# Altium PCB CRYO_ASIC_connectors.PcbDoc
Units mm, origin at the board's own origin, x right, y up, seen from the top; angles counter-clockwise.
Board outline 49.2 x 49.2 mm, 4 copper layers (Top Layer, Layer 1, Layer 2, Bottom Layer), stack 1.539 mm thick; 8 components, 68 nets, 176 pads, 75 vias.
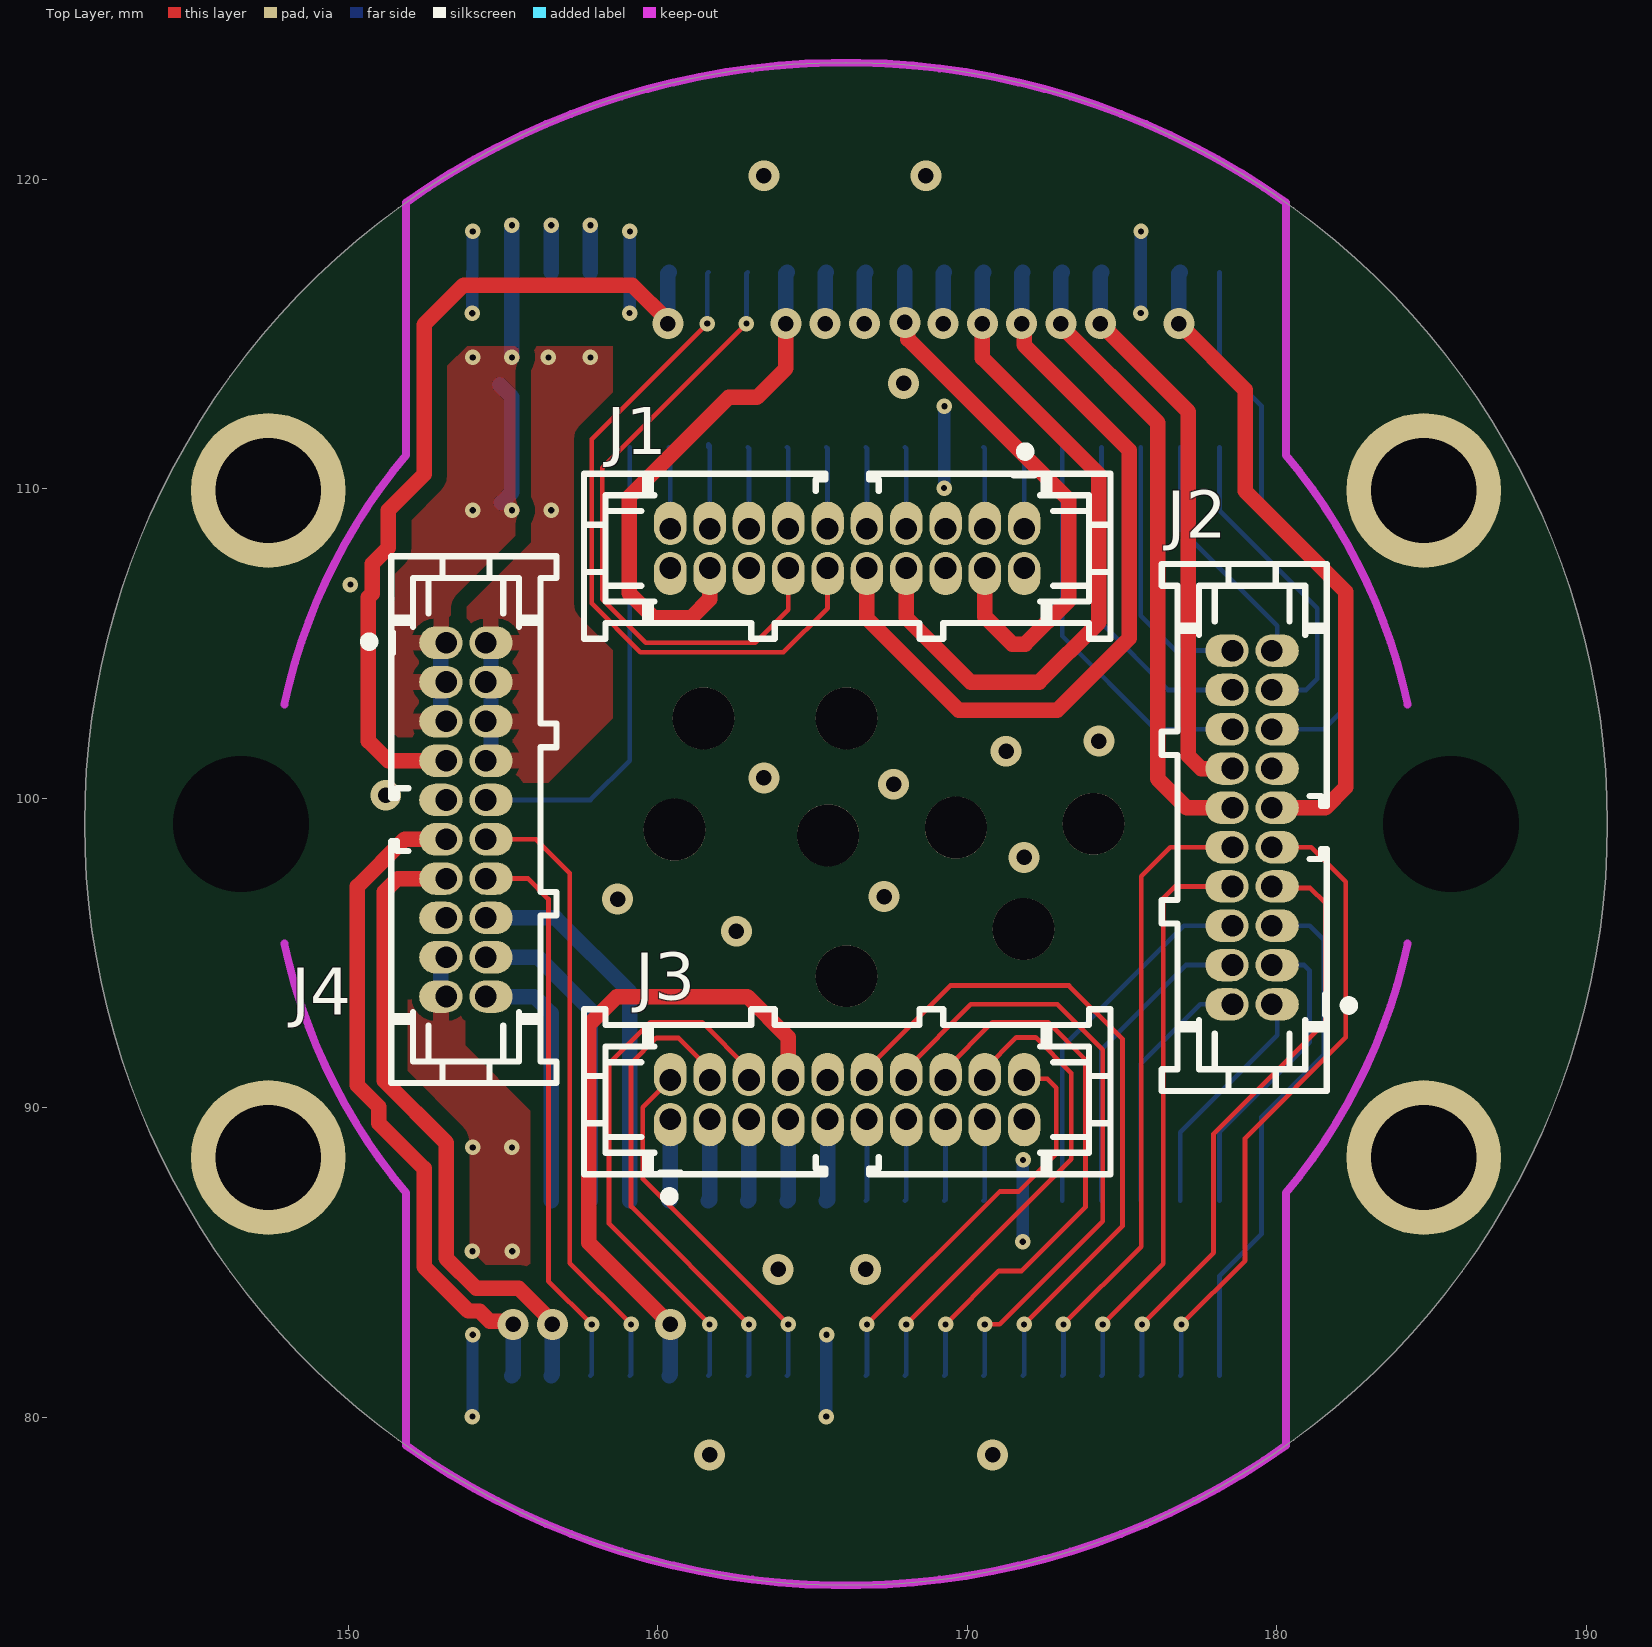
[diagram p0: Top Layer view]
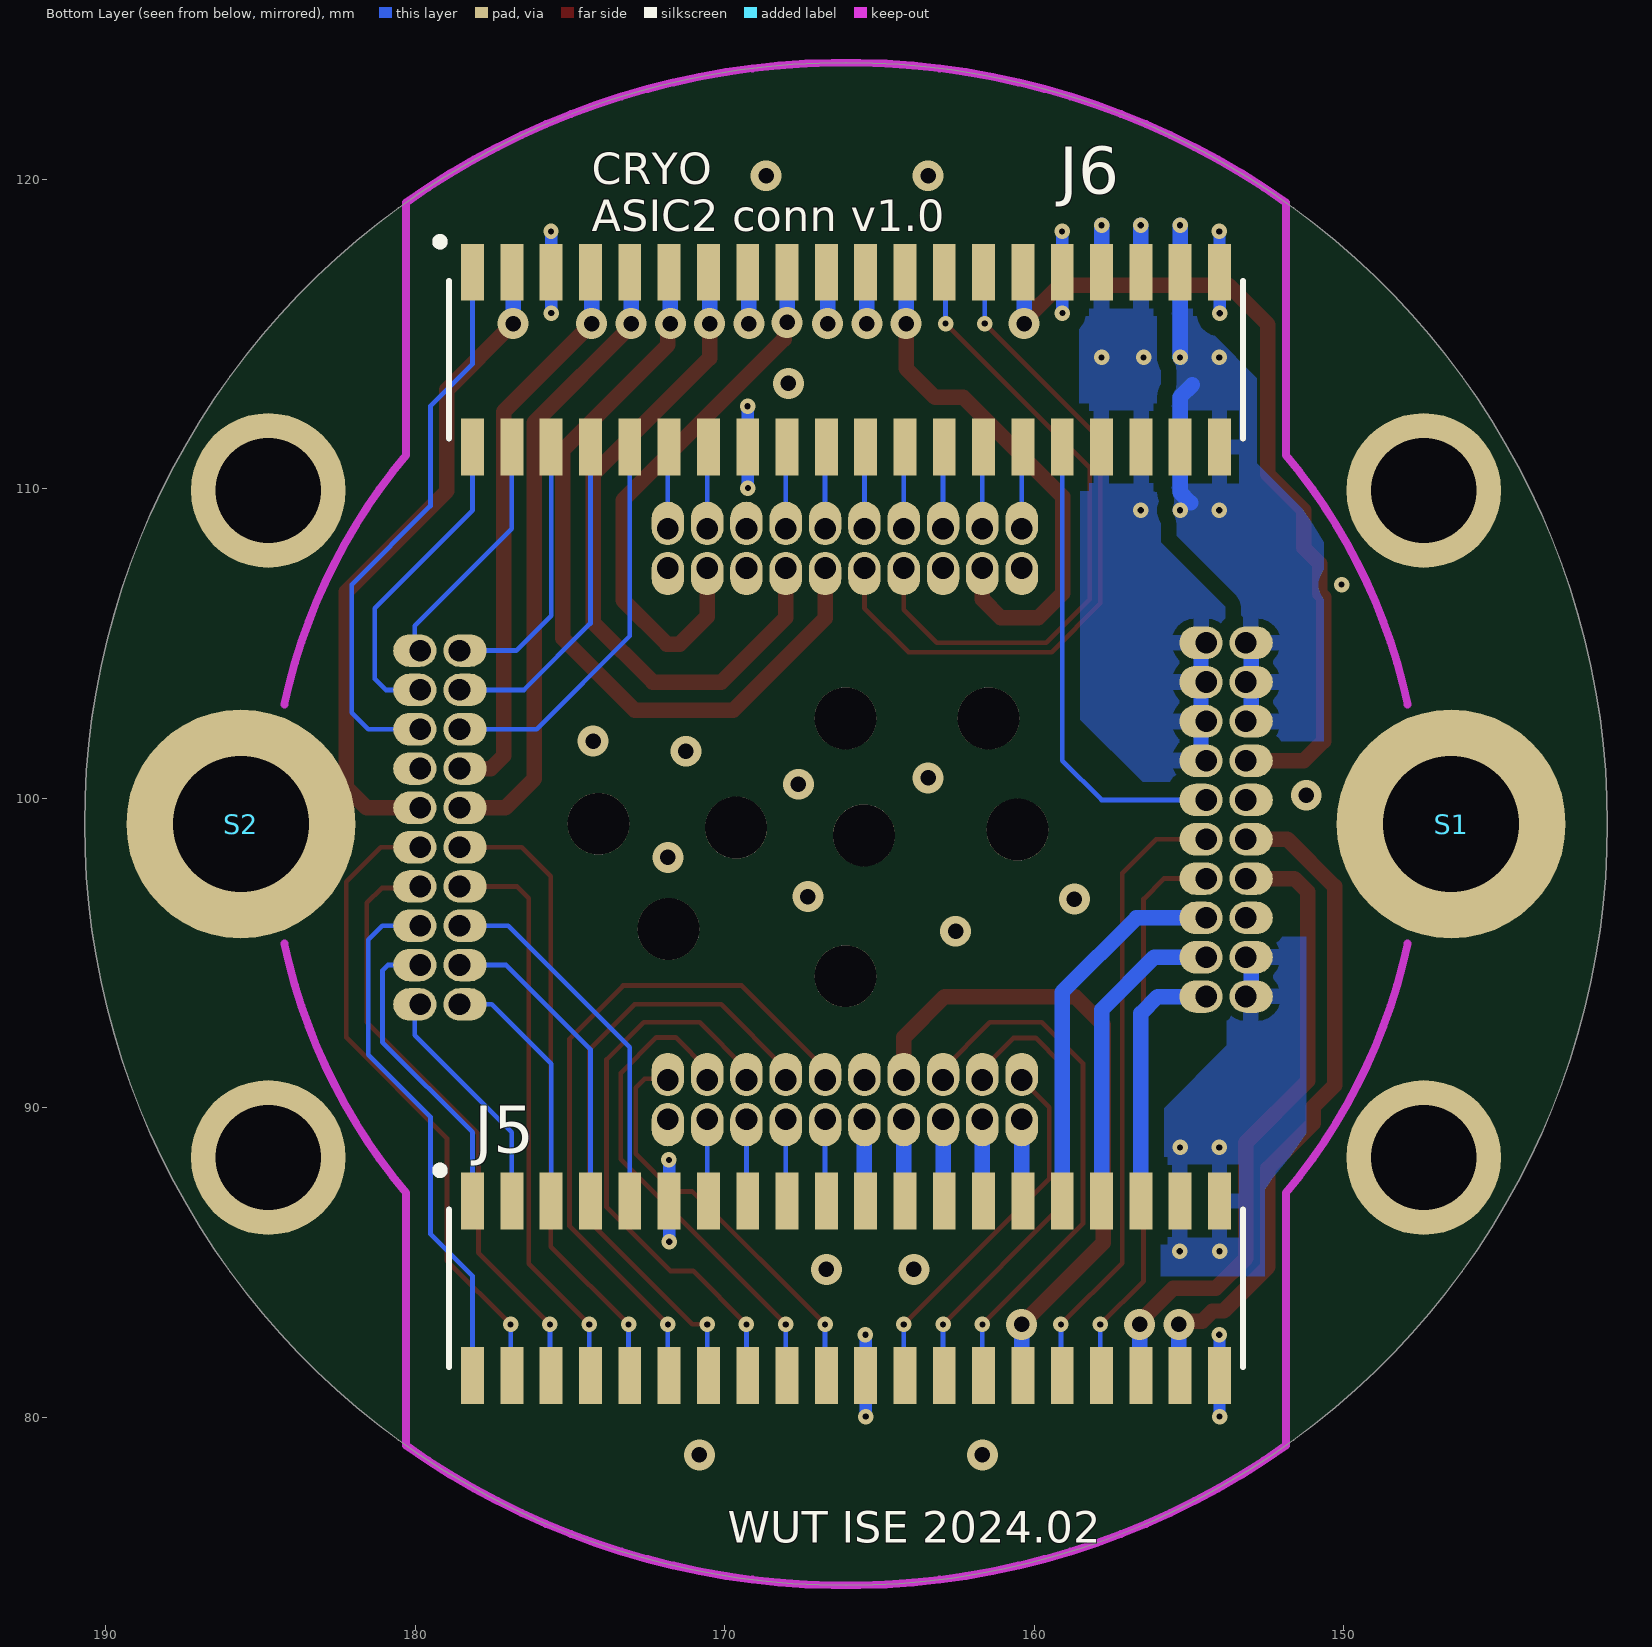
[diagram p1: Bottom Layer view, seen from below]
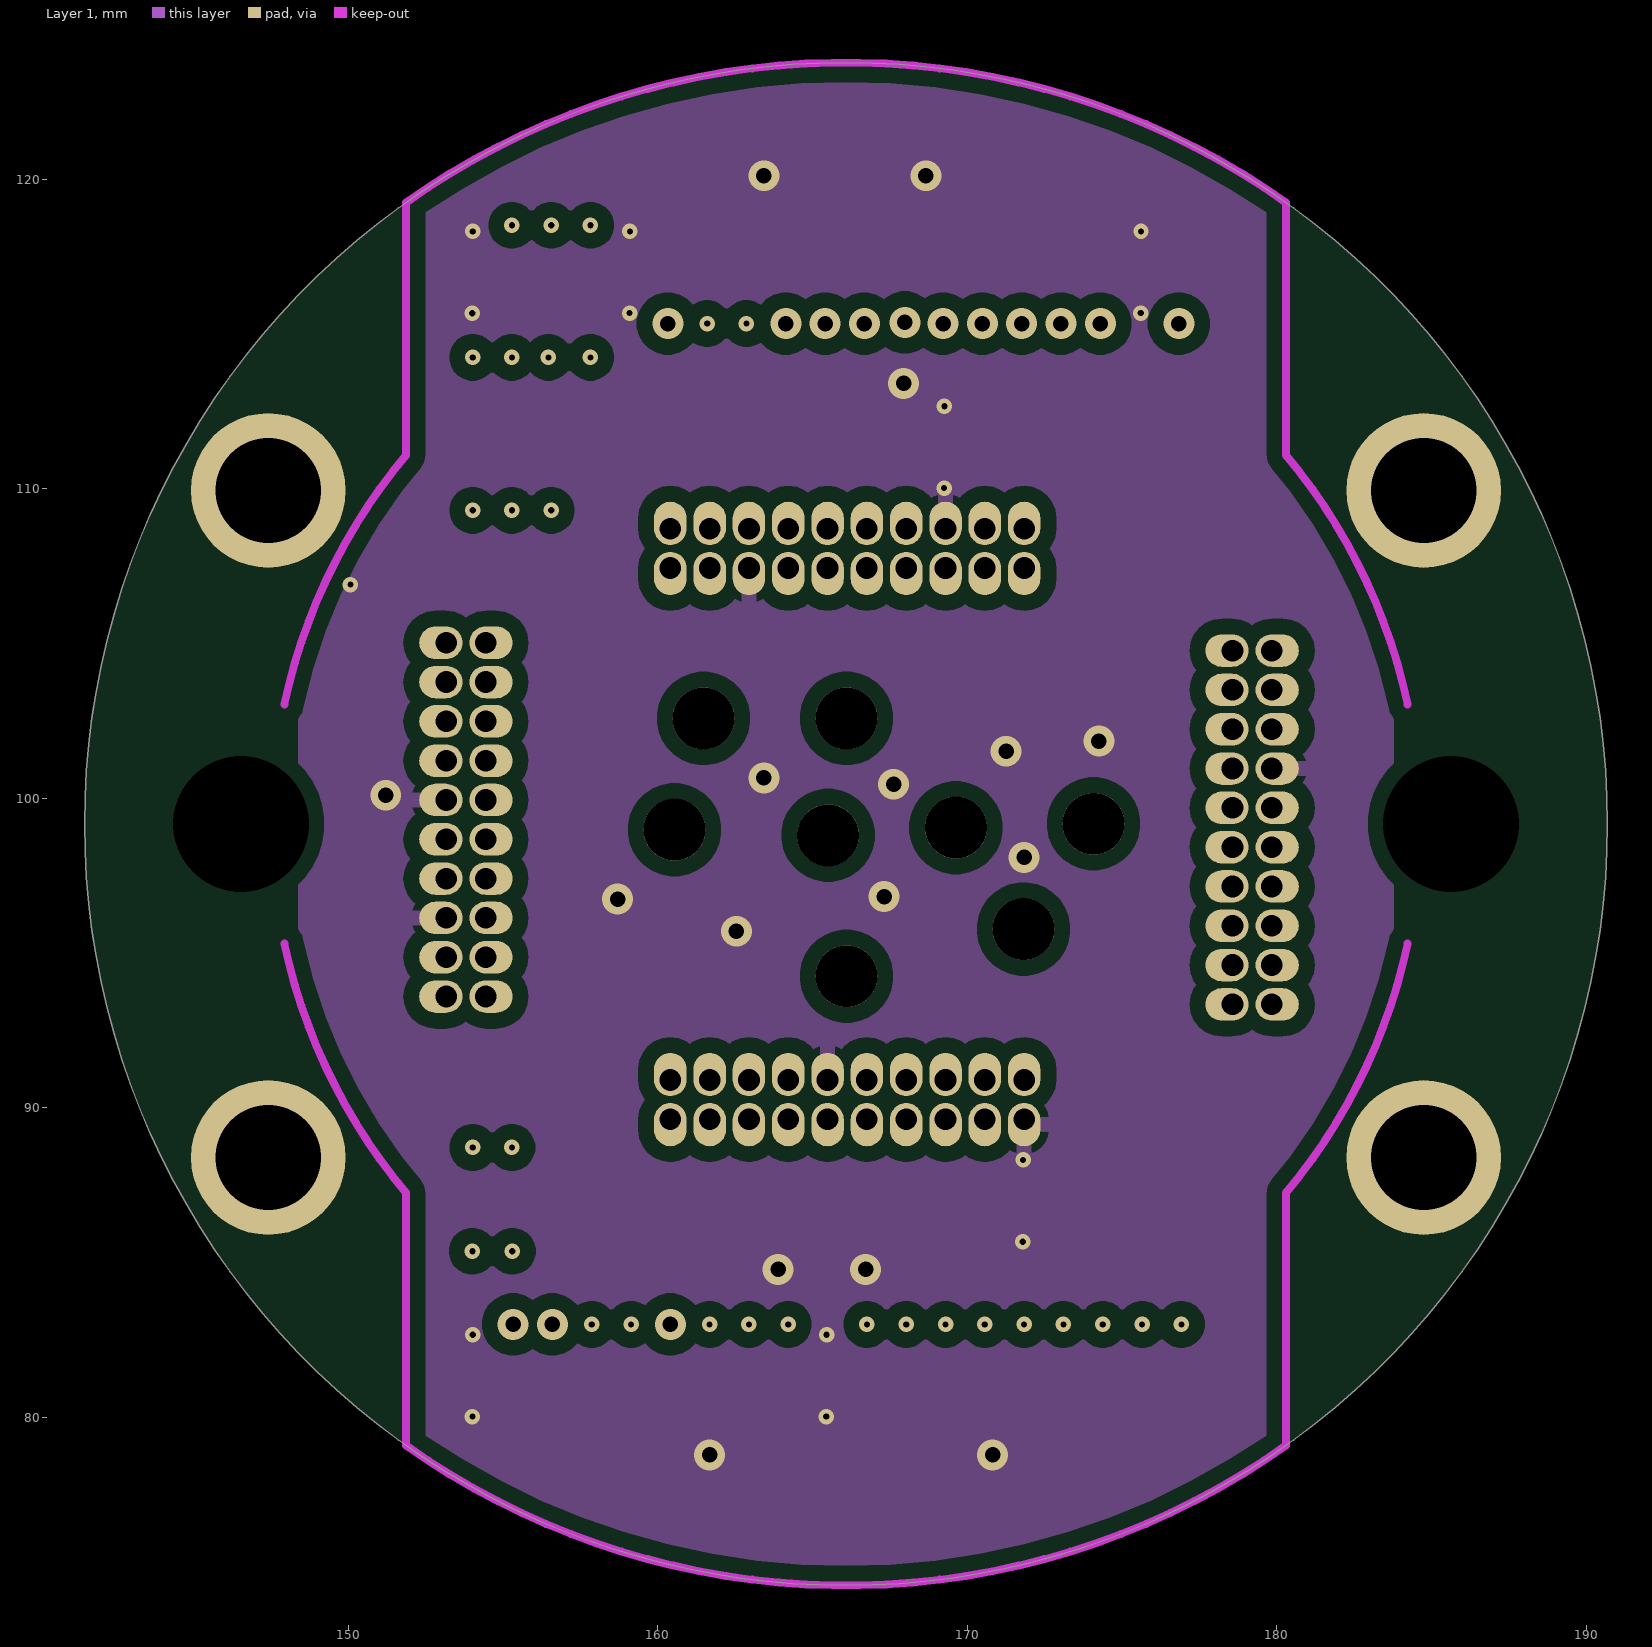
[diagram p2: Layer 1]
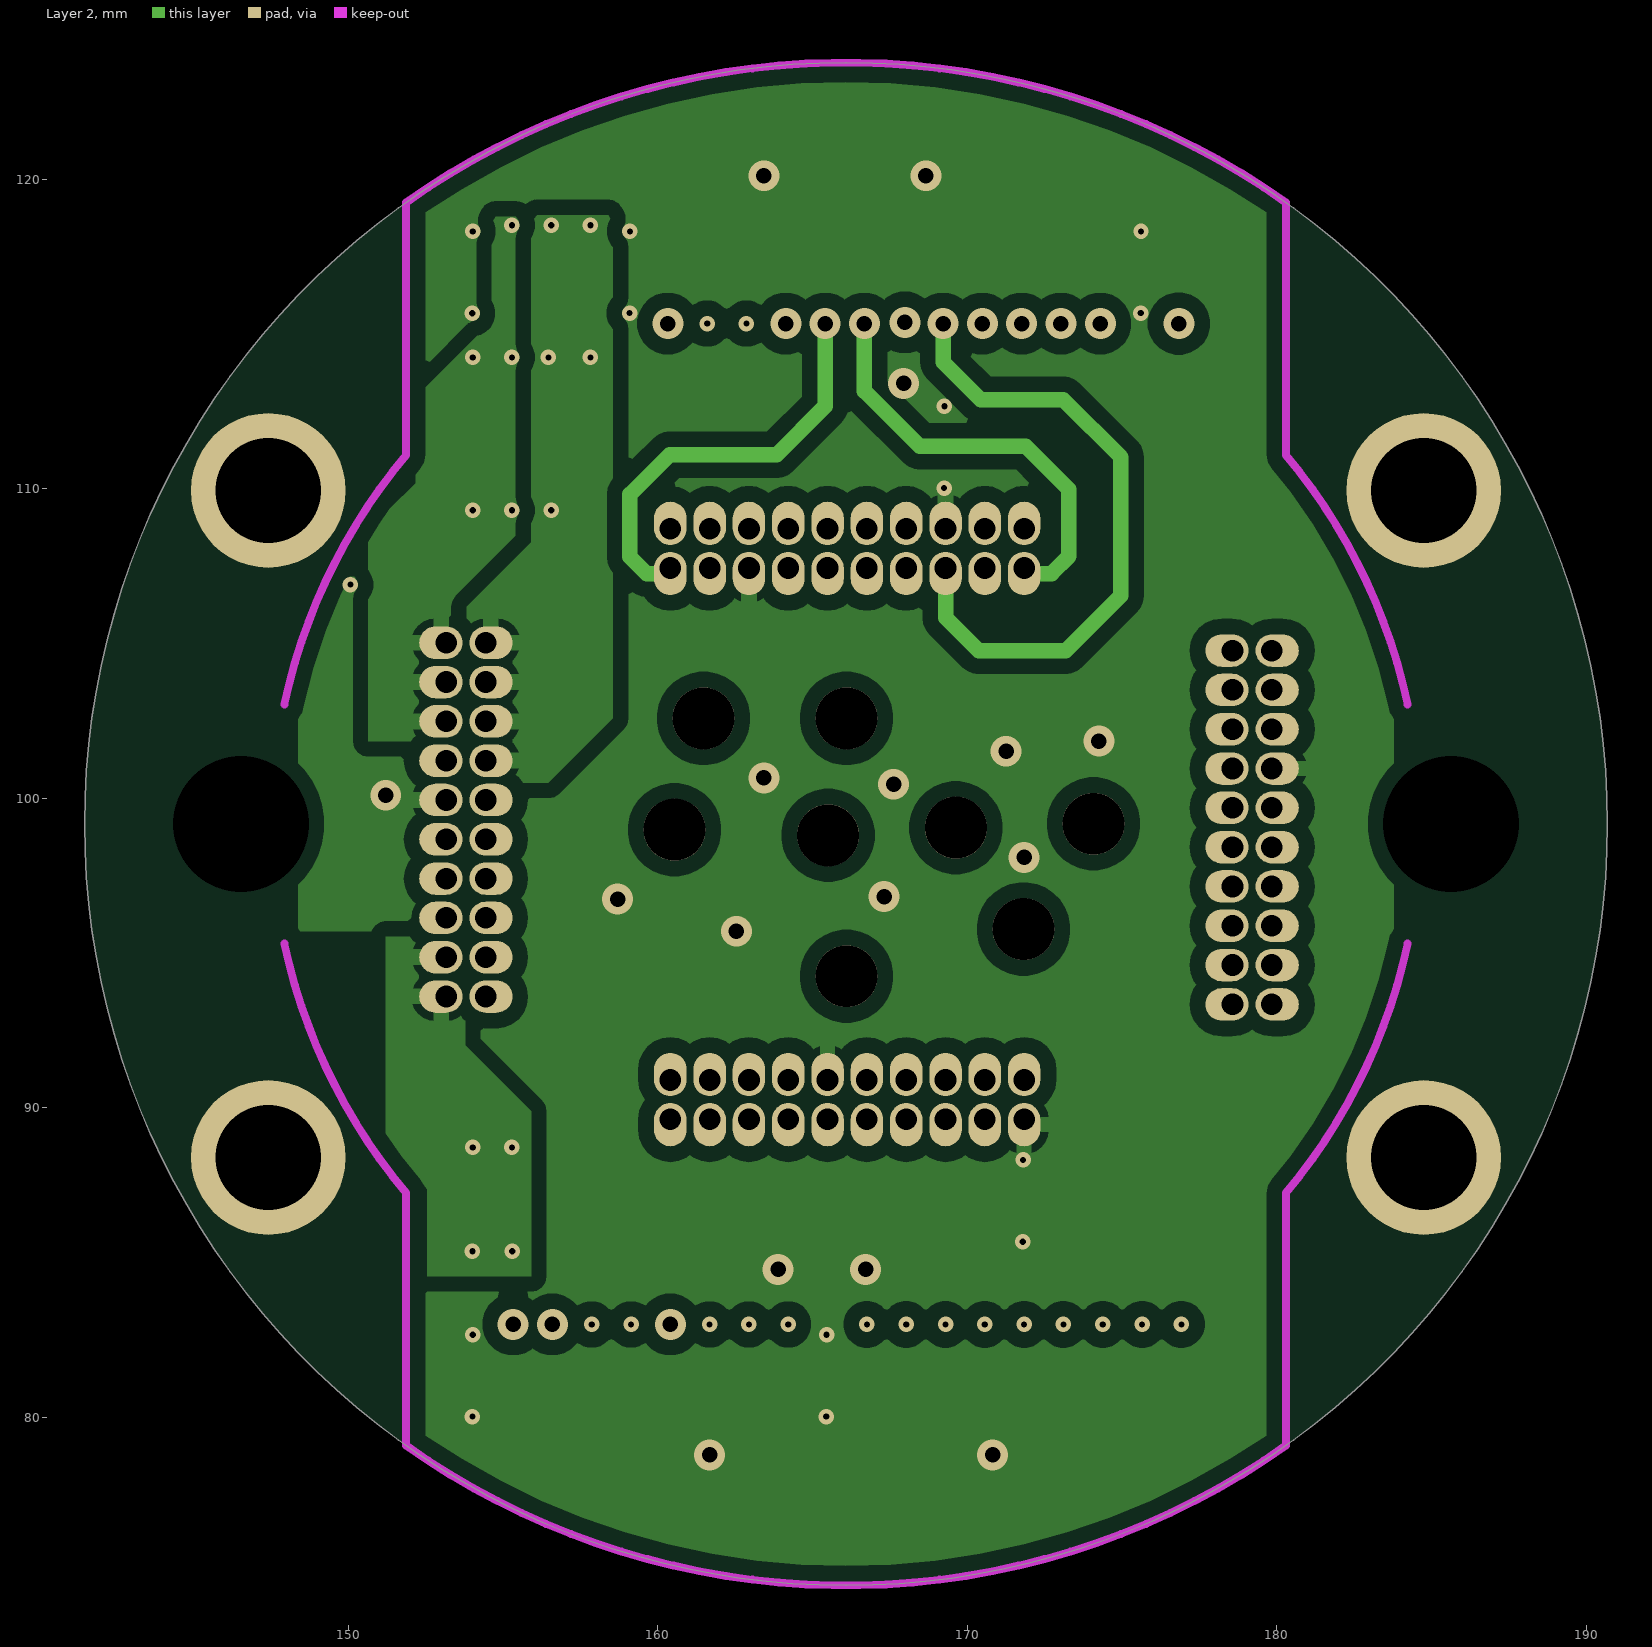
[diagram p3: Layer 2]
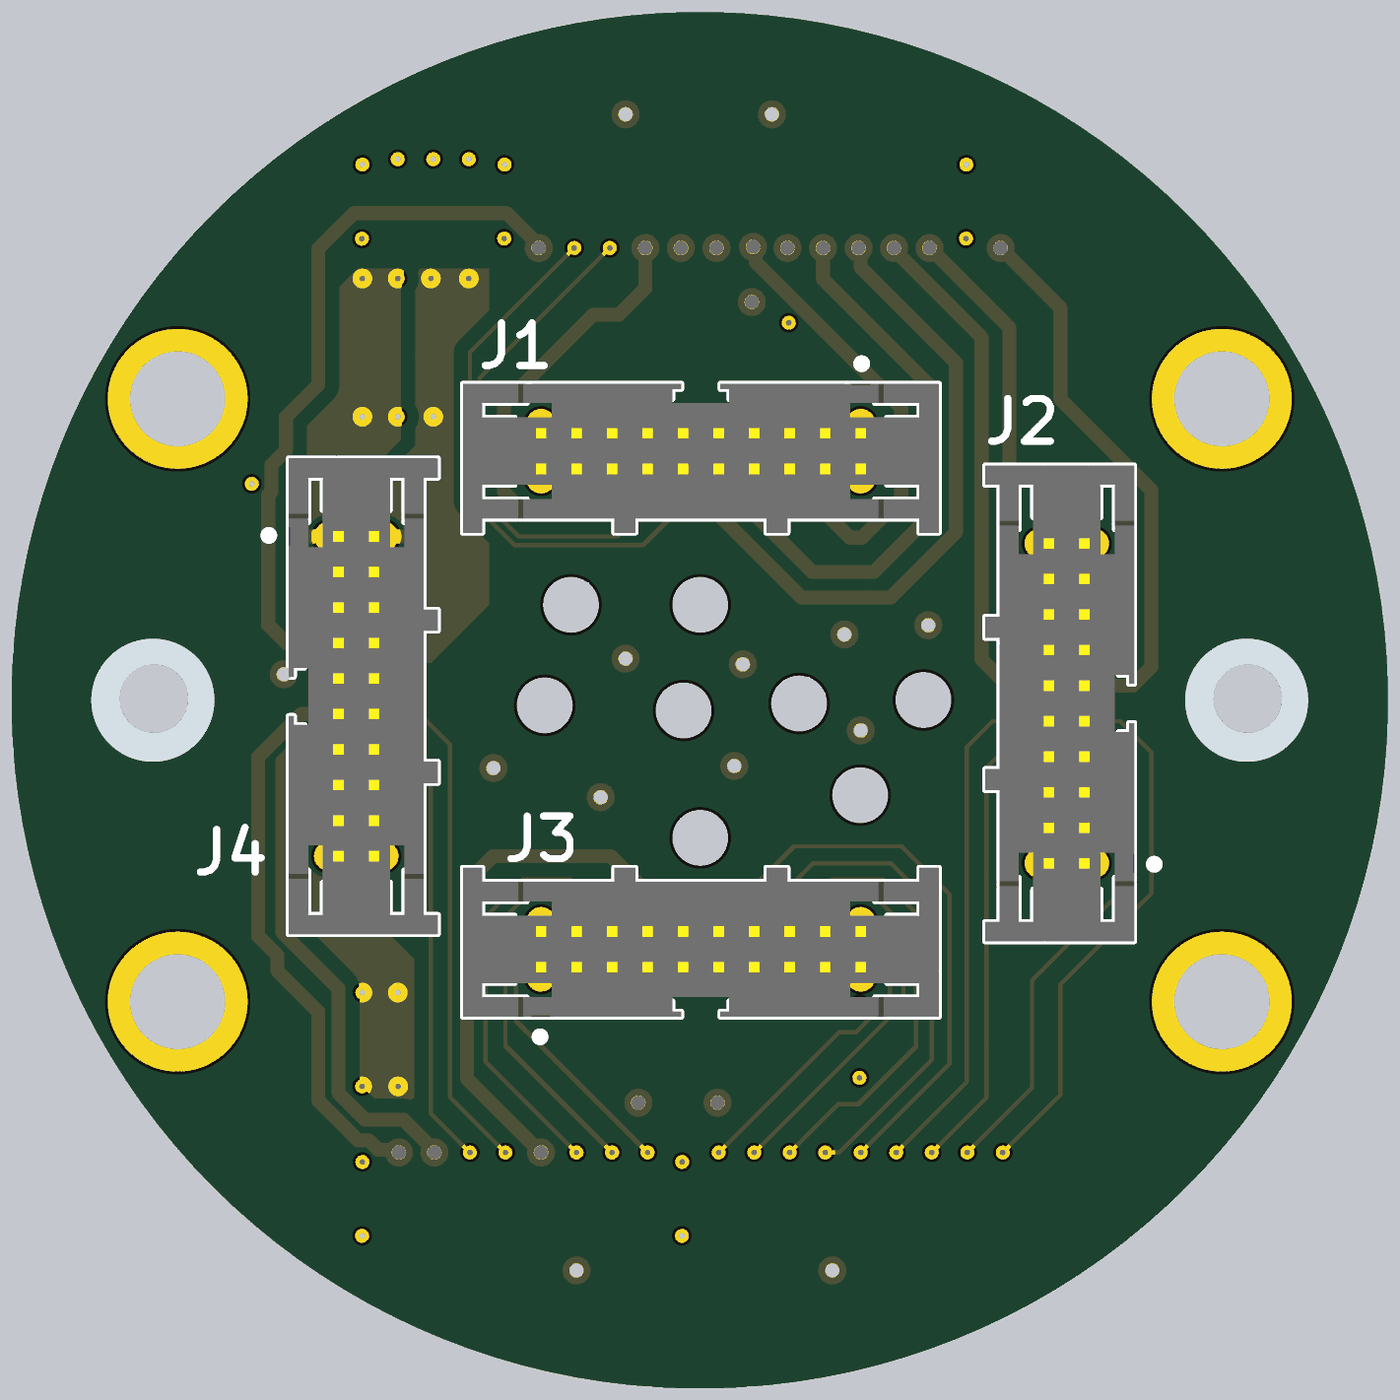
[diagram p4: 3D render of the assembled board from above, using the file's embedded part models]
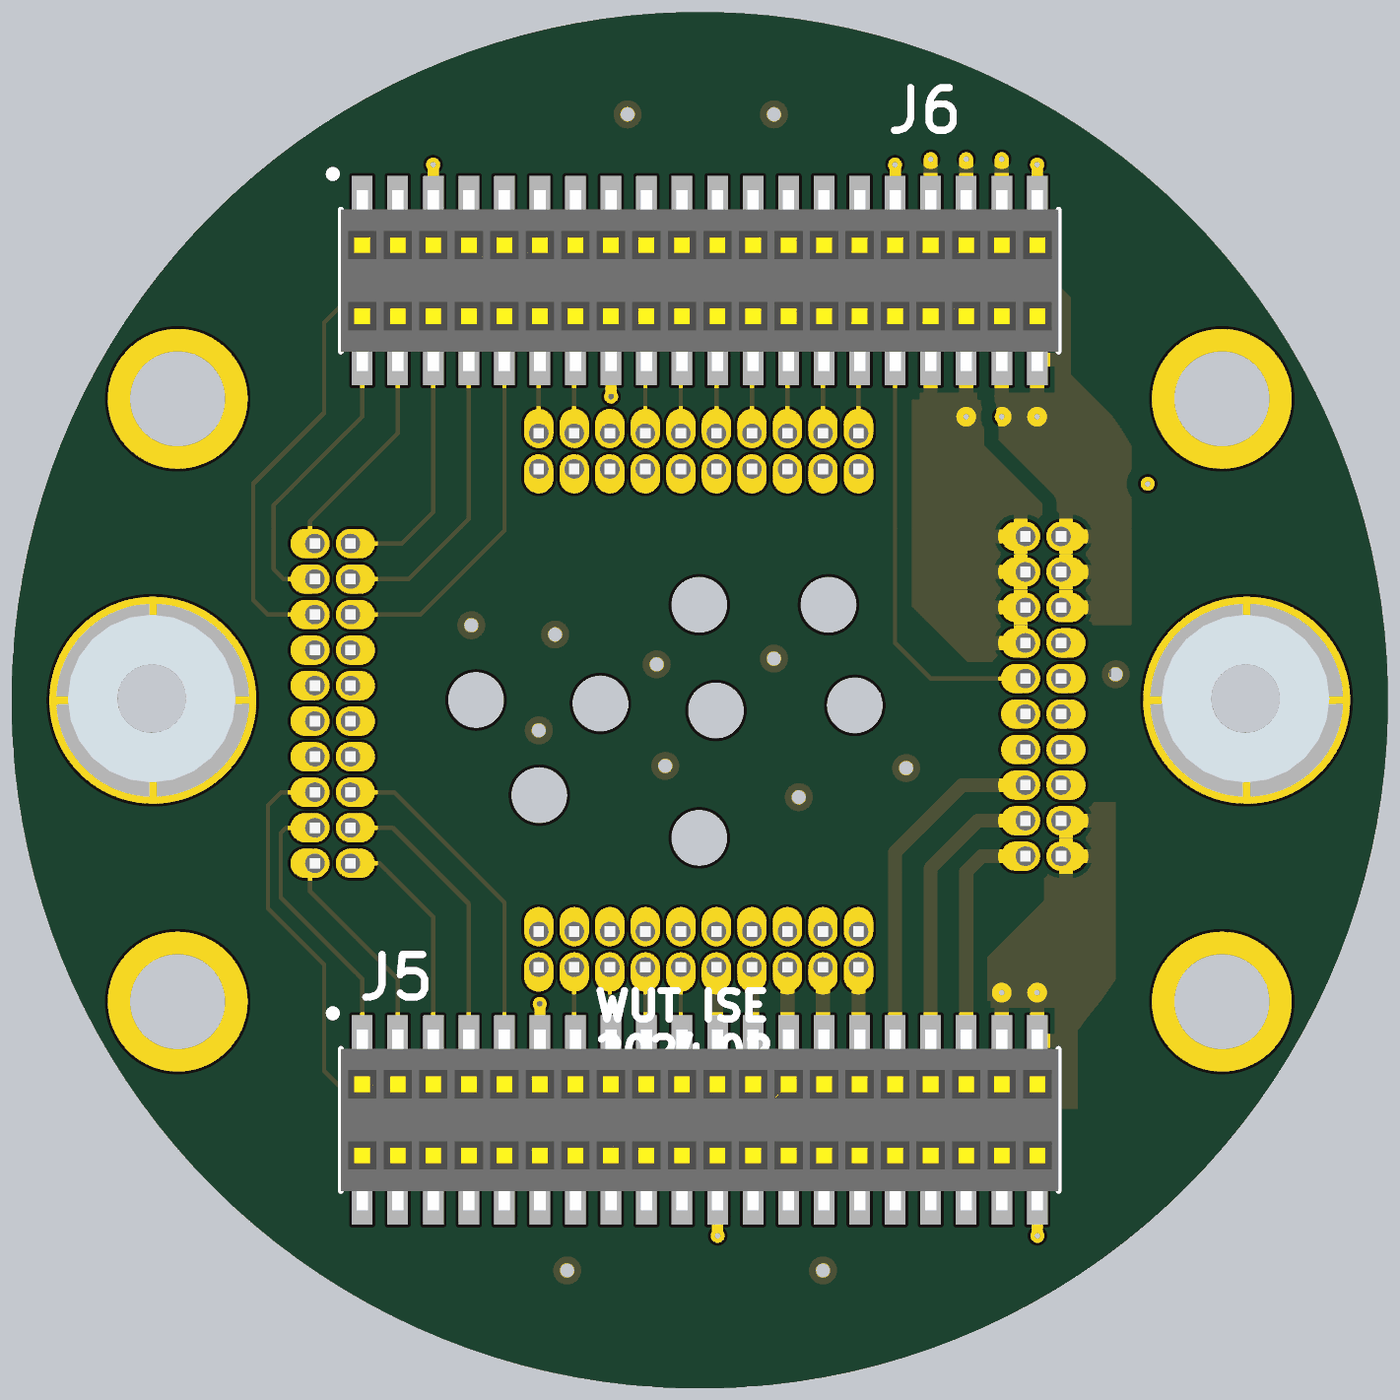
[diagram p5: 3D render of the assembled board from below, using the file's embedded part models]

## Layer stack, top to bottom
Top Solder: solder mask 0.0102, Solder Resist, Dk 3.5
Top Layer: signal copper 0.018
Dielectric 2: prepreg 0.1803, PP-021, Dk 4.7
Dielectric 4: prepreg 0.1803, PP-021, Dk 4.7
Layer 1: signal copper 0.035
Dielectric 1: core 0.7112, Core-039, Dk 4.8
Layer 2: signal copper 0.035
Dielectric 5: prepreg 0.1803, PP-021, Dk 4.7
Dielectric 3: prepreg 0.1803, PP-021, Dk 4.7
Bottom Layer: signal copper 0.018
Bottom Solder: solder mask 0.0102, Solder Resist, Dk 3.5

## Board outline
141.476,99.173 ccw(c166.076,99.173) 166.076,74.573 ccw(c166.076,99.173) 190.676,99.173 ccw(c166.076,99.173) 166.076,123.773 ccw(c166.076,99.173)

## Design rules (kind name [scope] priority, off if disabled: settings)
Clearance Clearance_1 [InNetClass('Imax30') or InNetClass('Imax45')] p1: gap=0.5 ignorepadtopadclearanceinfootprint=FALSE except(0.2: Arc-Arc Arc-Track Arc-SMDPad Arc-THPad Arc-Via Arc-Text Arc-Hole Track-Track Track-SMDPad Track-THPad Track-Via Track-Text Track-Hole SMDPad-SMDPad SMDPad-THPad SMDPad-Via SMDPad-Text SMDPad-Hole THPad-THPad THPad-Via THPad-Text THPad-Hole Via-Via Via-Text Via-Hole Text-Text Text-Hole)
Clearance [All] p2: gap=0.127 ignorepadtopadclearanceinfootprint=FALSE except(0.5: Arc-Poly Track-Poly SMDPad-Poly THPad-Poly Via-Poly Fill-Poly Poly-Poly Poly-Region Poly-Text Poly-Hole)
DiffPairsRouting [All] p1: maxlimit=0.254 minlimit=0.254 mostfreqgap=0.254 toplayer_minwidth=0.152 toplayer_maxwidth=0.381 toplayer_prefwidth=0.381 midlayer1_minwidth=0.152 midlayer1_maxwidth=0.381 midlayer1_prefwidth=0.381 midlayer2_minwidth=0.152 midlayer2_maxwidth=0.381 midlayer2_prefwidth=0.381 bottomlayer_minwidth=0.152 bottomlayer_maxwidth=0.381 bottomlayer_prefwidth=0.381 maxuncoupledlength=12.7
HoleSize [All] p1: absolutevalues=TRUE maxlimit=5.08 minlimit=0.2 maxpercent=80.000 minpercent=20.000
MinimumSolderMaskSliver [All] p1 off: minsoldermaskwidth=0.254
PolygonConnect Via [All vs IsVia] p1: connectstyle=Direct reliefconductorwidth=0.254 reliefentries=4 polygonreliefangle="90 Angle" airgapwidth=0.254
PolygonConnect [All] p2: connectstyle=Relief reliefconductorwidth=0.5 reliefentries=4 polygonreliefangle="90 Angle" airgapwidth=0.254
RoutingVias RoutingVias_1 [InNetClass('Imax30') or InNetClass('Imax45')] p1: holewidth=0.5 width=1 viastyle="Through Hole" minholewidth=0.5 minwidth=1 maxholewidth=0.5 maxwidth=1
RoutingVias [All] p2: holewidth=0.2 width=0.5 viastyle="Through Hole" minholewidth=0.2 minwidth=0.4 maxholewidth=0.711 maxwidth=1 viatemplateguid#1={C6DFBB91-ED27-42AF-86C9-B59DD49ECB67} viatemplatename#1=v50h20m0mx0
SilkToSilkClearance [All] p1 off: silktosilkclearance=0.254
SilkToSolderMaskClearance [IsPad] p1 off: minsilkscreentomaskgap=0.254 clearancetoexposedcopper=TRUE
SolderMaskExpansion [All] p1: expansion=0.102 istentingtop=FALSE
Width Width_imax45 [InNetClass('Imax45')] p1: maxlimit=1 minlimit=0.3 preferedwidth=0.5
Width Width_imax30 [InNetClass('Imax30')] p2: maxlimit=1 minlimit=0.21 preferedwidth=0.4
Width [All] p3: maxlimit=5.08 minlimit=0.127 preferedwidth=0.254
25 further rules are at their usual default settings.

## Classes and differential pairs
net class Imax45: P45V0_D16 P45V0_S16
net class Imax30: P3V3_D5 P3V3_S5 P45V0_D8 P45V0_D9 P45V0_D10 P45V0_D11 P45V0_D12 P45V0_D13 P45V0_D14 P45V0_D15 P45V0_D17 P45V0_S8 P45V0_S9 P45V0_S10 P45V0_S11 P45V0_S12 P45V0_S13 P45V0_S14 P45V0_S15 P45V0_S17
net class Imax7: DRAIN_MUX P3V3_D4 P3V3_D6 P3V3_D7 P3V3_S4 P3V3_S6 P3V3_S7
net class Imax5: P1V8_D0 P1V8_D1 P1V8_D2 P1V8_D3 P1V8_S0 P1V8_S1 P1V8_S2 P1V8_S3

## Components (designator, comment, footprint, x,y, rotation, side; value= is the part's Value field where it differs from the comment)
J1 "Header 20" 3M_45220-600230 166.116,108.077 r180 top
J2 "Header 20" 3M_45220-600230 179.197,99.06 r90 top
J3 "Header 20" 3M_45220-600230 166.116,90.269 r0 top
J4 "Header 20" 3M_45220-600230 153.797,99.314 r270 top
J5 "Socket 40" SAMTEC_RSM-120-02-L-D-K-TR 166.076,84.173 r180 bottom
J6 "Socket 40" SAMTEC_RSM-120-02-L-D-K-TR 166.076,114.173 r180 bottom
S1 "9774140360" 9774140360 146.526,99.173 r180 bottom
S2 "9774140360" 9774140360 185.626,99.173 r180 bottom

## Footprints (in the part's own frame and the unit in brackets; to place one, negate y for a bottom-side part, rotate by r counter-clockwise, add the part's x,y. Pads: shape width x height; smd on the part's side, far side on the other; paste and mask are expansions set on the pad)
3M_45220-600230 [mm] "20 Contacts - 1.27mm (0.050\") Pitch - Shrouded Boardmount Vertical Header Without Latch/Ejectors, 452 Series"
  oval 1.05x1.4 hole 0.7 copper offset 0,-0.175: 1(-5.715,-0.635) 3(-4.445,-0.635) 5(-3.175,-0.635) 7(-1.905,-0.635) 9(-0.635,-0.635) 11(0.635,-0.635) 13(1.905,-0.635) 15(3.175,-0.635) 17(4.445,-0.635) 19(5.715,-0.635)
  oval 1.05x1.4 hole 0.7 copper offset 0,0.175: 2(-5.715,0.635) 4(-4.445,0.635) 6(-3.175,0.635) 8(-1.905,0.635) 10(-0.635,0.635) 12(0.635,0.635) 14(1.905,0.635) 16(3.175,0.635) 18(4.445,0.635) 20(5.715,0.635)
  silkscreen extent -8.51,-3.28 8.51,2.92, body extent -8.51,-2.41 8.51,2.92, height 5.65
9774140360 [mm] "SMD Steel Spacer with internal Thread"
  round 7.4 smd paste-576.133: 1(0,0)
  round 0 hole 4.4 unplated: ""(0,0)
  body extent -3.04,-2.94 2.96,3.05, height 14
SAMTEC_RSM-120-02-L-D-K-TR [mm] "40 Contacts - Pitch 1.27mm - Dual Row Straight SMD Micro Socket"
  rect 0.74x1.84 smd: 1(-12.065,2.825) 2(-12.065,-2.825) 3(-10.795,2.825) 4(-10.795,-2.825) 5(-9.525,2.825) 6(-9.525,-2.825) 7(-8.255,2.825) 8(-8.255,-2.825) 9(-6.985,2.825) 10(-6.985,-2.825) 11(-5.715,2.825) 12(-5.715,-2.825) 13(-4.445,2.825) 14(-4.445,-2.825) 15(-3.175,2.825) 16(-3.175,-2.825) 17(-1.905,2.825) 18(-1.905,-2.825) 19(-0.635,2.825) 20(-0.635,-2.825) 21(0.635,2.825) 22(0.635,-2.825) 23(1.905,2.825) 24(1.905,-2.825) 25(3.175,2.825) 26(3.175,-2.825) 27(4.445,2.825) 28(4.445,-2.825) 29(5.715,2.825) 30(5.715,-2.825) 31(6.985,2.825) 32(6.985,-2.825) 33(8.255,2.825) 34(8.255,-2.825) 35(9.525,2.825) 36(9.525,-2.825) 37(10.795,2.825) 38(10.795,-2.825) 39(12.065,2.825) 40(12.065,-2.825)
  silkscreen extent -13.24,-2.54 12.83,3.94, body extent -12.83,-3.23 12.83,3.23, height 6.07

## Part data
J1 J2 J3 J4: library part 3M_45220-600230, "Connector 20 Male", Manufacturer=3M, Manufacturer Part Number=45220-600230, Author="CERN DEM MR", Component Type=Standard, ComponentHeight=5.64mm, CreateDate=15.08.2019, Family="Header 20", HelpURL=\\cern.ch\dfs\Applications\Altium\Datasheets\3M_45220-600230.pdf, LatestRevisionDate=15.08.2019, Mounted=Yes, Part Description="20 Contacts - 1.27mm (0.050\") Pitch - Shrouded Boardmount Vertical Header Without Latch/Ejectors, 452 Series", Part Number=3M_45220-600230, Pin Count=20, PressFit=No, Sense=No, SMD=No, Socket=No, Status=None
J5 J6: library part SAMTEC_RSM-120-02-L-D-K-TR, "Connector 40 Female", Manufacturer=SAMTEC, Manufacturer Part Number=RSM-120-02-L-D-K, Author="CERN DEM JLC", Component Type=Standard, ComponentHeight=6.1mm, CreateDate=09.01.2013, Family="Socket 40", HelpURL=\\cern.ch\dfs\Applications\Altium\Datasheets\SAMTEC_RSM-120-02-L-D-K-TR.pdf, LatestRevisionDate=09.01.2023, Mounted=Yes, Part Description="40 Contacts, Pitch 1.27mm, Dual Row Straight SMD Micro Socket", Part Number=SAMTEC_RSM-120-02-L-D-K-TR, Pin Count=40, PressFit=No, Sense=No, SMD=Yes, Socket=No, Status=None, System=Connector
S1 S2: library part "WA-SMSI,  9774140360", "WA-SMSI SMD Steel Spacer with internal Thread", Manufacturer="Wurth Elektronik", ComponentLink1Description=Manufacturer, ComponentLink1URL=http://www.we-online.de, ComponentLink2Description=Datasheet, ComponentLink2URL=http://katalog.we-online.de/em/datasheet/9774140360.pdf, Created by="Baojun Chen", Created Date=20.Oct.2015, partNo=9774140360

## Free pads (board coordinates)
  round 5 hole 3.4: 3(147.413,109.948) 4(147.413,88.398) 6(184.739,88.398) 7(184.739,109.948)
  round 2 hole 2 unplated: q19(160.534,98.99) q19(161.474,102.585) q19(165.498,98.807) q19(166.093,94.254) q19(166.093,102.585) q19(169.627,99.055) q19(171.812,95.778) q19(174.072,99.182)

## Via types
v1: diameter 0.5, hole 0.2, Top Layer to Bottom Layer, 45 vias
v2: diameter 1, hole 0.5, Top Layer to Bottom Layer, 30 vias

## Nets (pads, with @x,y where several pads share a name; then routed paths per layer and width w, separated by ;. In a path a pad name is that pad's centre, name@x,y a point inside that pad or via, vN(x,y) a via of type N, cw(c..) or ccw(c..) an arc to the next point about the centre after c; other vN are vias at no path point)
BGP_OUT: J2.16 J6.10 | length 12.8
  Bottom Layer w0.152: J6.10 173.061,105.247 176.073,102.235 J2.16
CLK: J2.3 J5.1 | length 9.9
  Bottom Layer w0.152: J5.1 178.141,89.213 181.051,92.123 181.051,94.437 180.873,94.615 J2.3
DAC_OUT: J2.15 J6.1 | length 18.3
  Bottom Layer w0.152: J6.1 178.141,114.035 179.502,112.674 179.502,109.449 182.042,106.909 182.042,102.768 181.508,102.235 J2.15
DATA_IN: J2.19 J6.4 | length 7.9
  Bottom Layer w0.152: J6.4 176.871,108.712 180.007,105.576 180.007,104.95 J2.19
DATA_RDY: J2.17 J6.2 | length 10.4
  Bottom Layer w0.152: J6.2 178.141,109.308 181.305,106.144 181.305,103.861 180.95,103.505 J2.17
DRAIN_MUX: J2.20 J6.6 | length 8.9
  Bottom Layer w0.152: J6.6 175.601,105.907 176.733,104.775 J2.20
GATE_MUX: J2.18 J6.8 | length 10.8
  Bottom Layer w0.152: J6.8 174.331,105.653 176.479,103.505 J2.18
GND: J1.5 J1.16 J2.13 J3.10 J3.19 J4.9 J4.15 J5.11 J5.22 J5.40 J6.5 J6.16 J6.31 J6.39 | length 18.4
  Bottom Layer w0.4: v1(154,115.672) 154.006,115.677 154.006,116.993 J6.39 v1@154.011,118.314 ; v1@154.011,80.032 J5.40 v1@154.011,82.664 ; v1@159.091,115.682 J6.31 v1@159.091,118.314 ; v1@165.441,80.032 J5.22 v1@165.441,82.664 ; v1@169.251,110.032 J6.16 v1@169.251,112.664 ; v1@171.791,85.682 J5.11 v1@171.791,88.314 ; v1@175.601,115.682 J6.5 v1@175.601,118.314
  other v1: 154.006,80.027 165.436,80.027 154.016,82.669 165.446,82.669 171.786,85.677 171.796,88.319 150.063,106.909 169.246,110.027 169.256,112.669 159.086,115.677 175.596,115.677 154.016,118.319 159.096,118.319 175.606,118.319
  other v2: 161.671,78.791 170.815,78.791 163.881,84.785 166.711,84.785 162.535,95.707 158.699,96.749 167.31,96.825 171.831,98.095 151.206,100.101 167.615,100.457 163.424,100.66 171.247,101.524 174.244,101.854 167.936,113.408 163.424,120.117 168.656,120.117
ICS_OUT: J1.1 J6.12 | length 2.7
  Bottom Layer w0.152: J6.12 171.831,111.308 J1.1
MUX_PN_OUT: J3.15 J5.15 | length 2.7
  Bottom Layer w0.152: J5.15 169.291,87.038 J3.15
P1V8_D0: J3.18 J5.18 | length 16
  Top Layer w0.152: v1(168.021,83.007) 173.355,88.341 173.355,91.127 172.207,92.276 171.583,92.276 170.561,91.254 J3.18
  Bottom Layer w0.152: J5.18 168.021,81.388 v1(168.021,83.007)
P1V8_D1: J3.20 J5.20 | length 13.4
  Top Layer w0.152: v1(166.751,83.007) 171.044,87.3 171.653,87.3 172.872,88.519 172.872,90.653 172.585,90.94 171.867,90.94 J3.20
  Bottom Layer w0.152: J5.20 166.751,81.388 v1(166.751,83.007)
P1V8_D2: J3.2 J5.24 | length 11.9
  Top Layer w0.152: J3.2 159.512,90.015 159.512,87.706 v1(164.211,83.007)
  Bottom Layer w0.152: J5.24 164.211,81.388 v1(164.211,83.007)
P1V8_D3: J3.4 J5.26 | length 15.3
  Top Layer w0.152: J3.4 161.671,91.254 160.663,92.262 159.952,92.262 159.131,91.44 159.131,86.817 v1(162.941,83.007)
  Bottom Layer w0.152: J5.26 162.941,81.388 v1(162.941,83.007)
P1V8_G0: J2.5 J5.2 | length 17.3
  Bottom Layer w0.152: J5.2 178.141,84.567 179.502,85.928 179.502,89.713 181.508,91.719 181.508,95.428 181.051,95.885 J2.5
P1V8_G1: J2.9 J5.4 | length 21
  Top Layer w0.152: v1(176.911,83.007) 178.968,85.065 178.968,89.024 182.22,92.276 182.22,97.307 181.102,98.425 J2.9
  Bottom Layer w0.152: J5.4 176.911,81.388 v1(176.911,83.007)
P1V8_S0: J4.10 J6.32 | length 15.3
  Bottom Layer w0.152: J4.10 157.821,99.949 159.091,101.219 J6.32
P1V8_S1: J1.3 J6.14 | length 2.7
  Bottom Layer w0.152: J6.14 170.561,111.308 J1.3
P1V8_S2: J1.7 J6.18 | length 2.7
  Bottom Layer w0.152: J6.18 168.021,111.308 J1.7
P1V8_S3: J1.9 J6.20 | length 2.7
  Bottom Layer w0.152: J6.20 166.751,111.308 J1.9
P3V3_D4: J3.6 J5.28 | length 19.2
  Top Layer w0.152: v1(161.671,83.007) 158.42,86.258 158.42,91.44 159.749,92.77 161.425,92.77 162.941,91.254 J3.6
  Bottom Layer w0.152: J5.28@161.671,81.388 J5.28 J5.28@161.671,81.388 ; J5.28@161.671,81.388 v1(161.671,83.007) J5.28@161.671,81.388
P3V3_D5: J3.8 J5.30 | length 21.2
  Top Layer w0.5: v2(160.401,83.007) 157.759,85.649 157.759,92.685 158.674,93.599 162.891,93.599 164.211,92.279 J3.8
  Bottom Layer w0.5: J5.30 160.401,81.388 v2(160.401,83.007)
P3V3_D6: J4.12 J5.32 | length 20.2
  Top Layer w0.152: J4.12 156.058,98.679 157.15,97.587 157.15,84.988 v1(159.131,83.007)
  Bottom Layer w0.152: J5.32 159.131,81.388 v1(159.131,83.007)
P3V3_D7: J4.14 J5.34 | length 18.3
  Top Layer w0.152: J4.14 155.804,97.409 156.464,96.749 156.464,84.404 v1(157.861,83.007)
  Bottom Layer w0.152: J5.34 157.861,81.388 v1(157.861,83.007)
P3V3_G2: J2.7 J5.6 | length 19.7
  Top Layer w0.152: v1(175.641,83.007) 177.952,85.319 177.952,89.163 181.559,92.77 181.559,96.622 181.077,97.104 179.883,97.104 J2.7
  Bottom Layer w0.152: J5.6 175.641,81.388 v1(175.641,83.007)
P3V3_G3: J2.8 J5.8 | length 18.6
  Top Layer w0.152: v1(174.371,83.007) 176.327,84.963 176.327,96.774 176.708,97.155 J2.8
  Bottom Layer w0.152: J5.8 174.371,81.388 v1(174.371,83.007)
P3V3_S4: J1.11 J6.22 | length 2.7
  Bottom Layer w0.152: J6.22 165.481,111.308 J1.11
P3V3_S5: J4.7 J6.29 | length 27.6
  Top Layer w0.5: J4.7 151.282,101.219 150.647,101.854 150.647,106.503 150.763,106.619 150.763,107.575 151.282,108.094 151.282,109.306 152.443,110.466 152.443,115.308 153.721,116.586 159.167,116.586 160.321,115.432 v2(160.321,115.339)
  Bottom Layer w0.5: v2(160.321,115.339) 160.321,116.958 J6.29
P3V3_S6: J1.15 J6.26 | length 2.7
  Bottom Layer w0.152: J6.26 162.941,111.308 J1.15
P3V3_S7: J1.13 J6.24 | length 2.7
  Bottom Layer w0.152: J6.24 164.211,111.308 J1.13
P18V0_G4: J2.10 J5.10 | length 20.5
  Top Layer w0.152: v1(173.101,83.007) 175.616,85.522 175.616,97.485 176.555,98.425 J2.10
  Bottom Layer w0.152: J5.10 173.101,81.388 v1(173.101,83.007)
P18V0_G5: J3.12 J5.12 | length 22.7
  Top Layer w0.152: J3.12 166.751,91.254 169.452,93.955 173.279,93.955 175.006,92.227 175.006,86.182 v1(171.831,83.007)
  Bottom Layer w0.152: J5.12 171.831,81.388 v1(171.831,83.007)
P18V0_G6: J3.14 J5.14 | length 20.6
  Top Layer w0.152: J3.14 168.021,91.254 170.112,93.345 172.907,93.345 174.371,91.881 174.371,86.335 171.044,83.007 v1(170.561,83.007)
  Bottom Layer w0.152: J5.14 170.561,81.388 v1(170.561,83.007)
P18V0_G7: J3.16 J5.16 | length 18.5
  Top Layer w0.152: v1(169.291,83.007) 171.018,84.734 171.749,84.734 173.812,86.797 173.812,91.564 172.607,92.77 170.807,92.77 169.291,91.254 J3.16
  Bottom Layer w0.152: J5.16 169.291,81.388 v1(169.291,83.007)
P45V0_D8: J4.11 J5.38 | length 23.7
  Top Layer w0.5: J4.11 151.816,98.679 150.292,97.155 150.292,90.729 150.978,90.043 150.978,89.51 152.443,88.044 152.443,84.869 153.873,83.439 154.236,83.439 154.572,83.103 155.225,83.103 v2(155.321,83.007)
  Bottom Layer w0.5: J5.38@155.321,81.388 J5.38 J5.38@155.321,81.388 ; J5.38@155.321,81.388 v2(155.321,83.007) J5.38@155.321,81.388
P45V0_D9: J4.13 J5.36 | length 20.9
  Top Layer w0.5: J4.13 151.587,97.409 151.155,96.977 151.155,90.881 153.162,88.875 153.162,85.14 154.127,84.176 155.496,84.176 156.591,83.081 v2(156.591,83.007)
  Bottom Layer w0.5: J5.36 156.591,81.388 v2(156.591,83.007)
P45V0_D10: J3.9 J5.21 | length 2.7
  Bottom Layer w0.5: J5.21 165.481,87.038 J3.9
P45V0_D11: J3.7 J5.23 | length 2.7
  Bottom Layer w0.5: J5.23 164.211,87.038 J3.7
P45V0_D12: J3.5 J5.25 | length 2.7
  Bottom Layer w0.5: J5.25 162.941,87.038 J3.5
P45V0_D13: J3.3 J5.27 | length 2.7
  Bottom Layer w0.5: J5.27 161.671,87.038 J3.3
P45V0_D14: J3.1 J5.29 | length 2.7
  Bottom Layer w0.5: J5.29 160.401,87.038 J3.1
P45V0_D15: J4.16 J5.31 | length 12.4
  Bottom Layer w0.5: J4.16 156.693,96.139 159.091,93.741 J5.31
P45V0_D16: J4.18 J5.33 | length 10.3
  Bottom Layer w0.5: J4.18 156.119,94.869 157.821,93.167 J5.33
P45V0_D17: J4.20 J5.35 | length 8.4
  Bottom Layer w0.5: J4.20 156.007,93.599 156.551,93.055 J5.35
P45V0_S8: J1.18 J6.23 | length 17.2
  Top Layer w0.5: J1.18 161.671,106.433 161.079,105.842 159.862,105.842 159.08,106.624 159.08,109.753 162.281,112.954 163.195,112.954 164.131,113.89 v2(164.131,115.339)
  Bottom Layer w0.5: v2(164.131,115.339) 164.131,116.958 J6.23
P45V0_S9: J1.20 J6.21 | length 15.4
  Layer 2 w0.5: J1.20 160.223,107.264 159.635,107.264 159.096,107.803 159.096,109.82 160.376,111.1 163.832,111.1 165.401,112.669 v2(165.401,115.339)
  Bottom Layer w0.5: v2(165.401,115.339) 165.401,116.958 J6.21
P45V0_S10: J1.2 J6.19 | length 15.7
  Layer 2 w0.5: v2(166.671,115.339) 166.671,113.161 168.453,111.379 171.882,111.379 173.279,109.982 173.279,107.823 172.72,107.264 172.009,107.264 J1.2
  Bottom Layer w0.5: v2(166.671,115.339) 166.671,116.958 J6.19
P45V0_S11: J1.4 J6.17 | length 18
  Top Layer w0.5: v2(167.98,115.378) 168.076,115.282 168.076,114.84 173.279,109.637 173.279,106.401 171.86,104.982 171.446,104.982 170.561,105.867 J1.4
  Bottom Layer w0.5: v2(167.98,115.378) J6.17
P45V0_S12: J1.6 J6.15 | length 22.8
  Layer 2 w0.5: v2(169.211,115.339) 169.223,115.327 169.223,114.089 170.434,112.878 173.101,112.878 174.955,111.023 174.955,106.553 173.177,104.775 170.358,104.775 169.291,105.842 J1.6
  Bottom Layer w0.5: v2(169.211,115.339) 169.211,116.958 J6.15
P45V0_S13: J1.8 J6.13 | length 22.4
  Top Layer w0.5: J1.8 168.021,105.842 170.104,103.759 172.314,103.759 174.244,105.689 174.244,110.461 170.481,114.224 v2(170.481,115.339)
  Bottom Layer w0.5: v2(170.481,115.339) 170.481,116.958 J6.13
P45V0_S14: J1.10 J6.11 | length 25.6
  Top Layer w0.5: J1.10 166.751,105.817 169.723,102.845 172.898,102.845 175.235,105.181 175.235,111.246 171.83,114.65 171.83,115.26 v2(171.751,115.339)
  Bottom Layer w0.5: v2(171.751,115.339) 171.751,116.958 J6.11
P45V0_S15: J2.12 J6.9 | length 20.5
  Top Layer w0.5: v2(173.021,115.339) 173.021,115.265 176.149,112.137 176.149,100.631 177.085,99.695 J2.12
  Bottom Layer w0.5: v2(173.021,115.339) 173.021,116.958 J6.9
P45V0_S16: J2.14 J6.7 | length 18.4
  Top Layer w0.5: v2(174.291,115.339) 177.14,112.49 177.14,101.371 177.546,100.965 J2.14
  Bottom Layer w0.5: v2(174.291,115.339) 174.291,116.958 J6.7
P45V0_S17: J2.11 J6.3 | length 21.6
  Top Layer w0.5: v2(176.831,115.339) 178.968,113.201 178.968,109.931 182.22,106.68 182.22,100.355 181.559,99.695 J2.11
  Bottom Layer w0.5: v2(176.831,115.339) 176.831,116.958 J6.3
SPI_CSn: J2.2 J5.5 | length 8.2
  Bottom Layer w0.152: J5.5 175.601,91.425 177.521,93.345 J2.2
SPI_MISO: J2.1 J5.3 | length 7.7
  Bottom Layer w0.152: J5.3 176.871,89.213 180.007,92.349 180.007,93.17 J2.1
SPI_MOSI: J2.4 J5.7 | length 10.3
  Bottom Layer w0.152: J5.7 174.331,91.897 177.049,94.615 J2.4
SYNC_IO_N: J3.11 J5.19 | length 2.7
  Bottom Layer w0.152: J5.19 166.751,87.038 J3.11
SYNC_IO_P: J3.13 J5.17 | length 2.7
  Bottom Layer w0.152: J5.17 168.021,87.038 J3.13
SYNC_UNI_IN: J2.6 J5.9 | length 12.1
  Bottom Layer w0.152: J5.9 173.061,91.959 176.987,95.885 J2.6
SYNC_UNI_OUT: J3.17 J5.13 | length 2.7
  Bottom Layer w0.152: J5.13 170.561,87.038 J3.17
Thermometer_1_1: J1.14 J6.25 | length 20.9
  Top Layer w0.152: v1(162.861,115.339) 158.2,110.678 158.2,106.433 159.604,105.029 163.144,105.029 164.211,106.096 J1.14
  Bottom Layer w0.152: v1(162.861,115.339) 162.861,116.958 J6.25
Thermometer_1_2: J1.19 J6.30 | length 2.7
  Bottom Layer w0.152: J6.30 160.401,111.308 J1.19
Thermometer_1_3: J1.17 J6.28 | length 2.8
  Bottom Layer w0.152: J6.28 161.631,111.434 161.671,111.394 J1.17
Thermometer_1_4: J1.12 J6.27 | length 22.4
  Top Layer w0.152: v1(161.591,115.339) 157.861,111.609 157.861,106.299 159.436,104.724 164.055,104.724 165.481,106.15 J1.12
  Bottom Layer w0.152: v1(161.591,115.339) 161.591,116.958 J6.27
VDD: J4.2 J4.4 J4.6 J4.8 J6.33 J6.34 J6.35 J6.36 | length 7.2
  Bottom Layer w0.5: J4.8 154.607,101.394 J4.6@154.607,102.664 ; J4.6 J4.6@154.607,102.664 ; J4.2 154.607,104.854 J4.6@154.607,102.664 ; J6.35 v1(156.551,118.516) ; J6.33 v1(157.821,118.516)
  other v1: 156.551,109.308 156.464,114.249 157.821,114.249
VDD33: J4.1 J4.3 J4.5 J6.37 J6.38 J6.40 | length 11.1
  Bottom Layer w0.5: J4.5 152.987,102.664 152.987,104.854 J4.1 ; 154.889,113.36 155.281,112.968 J6.38 155.281,109.891 154.94,109.55 ; v1(155.281,114.249) J6.37 v1(155.281,118.516)
  other v1: 154.016,109.308 155.281,109.308 154.016,114.249
VDDH: J4.17 J4.19 J5.37 J5.39 | length 1.4
  Bottom Layer w0.5: J4.19 152.987,93.774 152.987,94.694 J4.17
  other v1: 154.006,85.369 155.296,85.369 154.016,88.722 155.281,88.722
pads on no net: S1. S1.1 S2. S2.1

## Polygon pours and split planes (outlines as drawn)
VDD on Bottom Layer "VDD_L04_P015" (solid, remove dead copper, pour order 15): 155.931,118.847 155.905,118.821 155.905,108.28 153.822,106.197 153.822,100.508 156.464,100.508 158.547,102.591 158.547,118.847
VDDH on Bottom Layer "VDDH_L04_P017" (solid, pour order 17): 153.772,95.529 153.772,92.02 155.905,89.887 155.905,84.567 152.552,84.567 152.552,87.376 151.206,88.722 151.206,95.529
VDD33 on Bottom Layer "VDD33_L04_P016" (solid, remove dead copper, pour order 16): 155.88,118.796 155.88,108.229 153.822,106.172 153.822,101.854 150.647,101.854 150.647,108.661 152.806,110.82 152.806,113.577 154.635,115.406 154.635,118.796
VDD33 on Top Layer "VDD33_L01_P014" (solid, remove dead copper, pour order 14): 155.88,114.605 155.88,108.229 153.822,106.172 153.822,101.854 150.647,101.854 150.647,108.661 152.806,110.82 152.806,113.577 153.834,114.605
VDD on Top Layer "VDD_L01_P013" (solid, remove dead copper, pour order 13): 155.905,114.605 155.905,108.28 153.822,106.197 153.822,100.508 156.464,100.508 158.547,102.591 158.547,114.605
VDDH on Top Layer "VDDH_L01_P012" (solid, remove dead copper, pour order 12): 153.772,95.529 153.772,92.02 155.905,89.887 155.905,84.567 152.552,84.567 152.552,87.376 151.206,88.722 151.206,95.529
GND on Layer 2 "GND_L03_P011" (solid, remove dead copper, pour order 11): 151.624,73.119 182.849,73.119 193.049,83.319 193.049,110.694 193.224,110.869 179.024,125.069 151.549,125.069 139.049,112.569 139.049,87.919
VDD33 on Layer 2 "VDD33_L03_P010" (solid, remove dead copper, pour order 10): 155.88,118.796 155.88,108.229 153.822,106.172 153.822,101.854 150.647,101.854 150.647,108.661 152.171,110.185 152.171,112.942 154.635,115.406 154.635,118.796
VDD on Layer 2 "VDD_L03_P009" (solid, remove dead copper, pour order 9): 155.931,118.847 155.905,118.821 155.905,108.28 153.822,106.197 153.822,100.508 156.464,100.508 158.547,102.591 158.547,118.847
VDDH on Layer 2 "VDDH_L03_P008" (solid, pour order 8): 153.772,95.529 153.772,92.02 155.905,89.887 155.905,84.567 152.552,84.567 152.552,87.376 151.206,88.722 151.206,95.529
GND on Layer 1 "GND_L02_P018" (solid, remove dead copper, pour order 18): 151.627,73.155 182.852,73.155 193.052,83.355 193.052,110.73 193.227,110.905 179.027,125.105 151.552,125.105 139.052,112.605 139.052,87.955

## Keep-outs
Keep-Out Layer:
  lines w0.254: 147.931,95.316 ccw(c166.076,99.173) 151.866,87.249 151.866,79.093 ccw(c166.076,99.173) 180.287,79.093 180.286,87.249 ccw(c166.076,99.173) 184.221,95.316 ; 147.931,103.03 cw(c166.076,99.173) 151.866,111.097 151.866,119.252 ; 151.865,119.253 cw(c166.076,99.173) 180.287,119.253 ; 180.286,119.252 180.286,111.097 cw(c166.076,99.173) 184.221,103.03

## Other copper
Layer 1:
  pour cut-out: 183.765,102.54 183.765,95.809 184.708,95.809 184.739,95.778 184.739,102.489
  pour cut-out: 148.387,102.54 148.387,95.809 147.444,95.809 147.413,95.778 147.413,102.489
Layer 2:
  pour cut-out: 183.765,102.54 183.765,95.809 184.708,95.809 184.739,95.778 184.739,102.489
  pour cut-out: 148.387,102.54 148.387,95.809 147.444,95.809 147.413,95.778 147.413,102.489
  pour cut-out: 151.079,95.707 148.234,95.707 148.234,91.821 151.003,89.052

## Silkscreen, mask and mechanical layers (free items; w line width, h text height)
Bottom Overlay:
  text "CRYO  / ASIC2 conn v1.0" at 174.291,118.319 h1.02
  text "WUT ISE 2024.02" at 169.901,75.946 h1.02
Mechanical 1:
  circle w0.254: c166.076,99.173 r24.6
Mechanical 2:
  lines w0.254: 144.853,102.915 cw(c166.076,99.173) 152.224,115.681 ; 158.705,78.922 ccw(c166.076,99.173) 173.447,78.922 ; 179.928,115.681 cw(c166.076,99.173) 187.299,102.915